# EAGLE board DSP_DC_SYNTH (EAGLE 8.6.0)

Size 100 x 100 mm. Coordinates in mm from the lower left corner, seen from the top.
Outline: 0,0 100,0 100,100 0,100 0,0
Copper layers (1*16): Top 0.035mm / dielectric 1.5mm / Bottom 0.035mm
Design rules "default *": minimum track width 6mil, minimum drill 0.35mm, track to track 6mil, track to pad 6mil, pad to pad 6mil, via to via 6mil, smd to smd 6mil, copper to edge 40mil, drill to drill 6mil, minimum pad ring 10mil, minimum via ring 8mil, stop-mask expansion 4mil, vias tented up to drill 0mil, thermal gap 10mil
Holes 4 mm at 4,96 96,96 96,4 4,4

## Footprints (pad centres in the part's own frame; a part is rotated, then mirrored left to right if it is on the bottom)
R0603 = smd 1 x 1.1: 1 -0.85,0; 2 0.85,0
EXV-9G = smd 3.2 x 1.473: 1 -2.807,0; 2 2.807,0
0603 = smd 1 x 1.1: 1 -0.85,0; 2 0.85,0
KWL-R1025VB = drill 1.016: 1+ 0,0; 1- 0,7.62; 2+ 2.54,0; 2- 2.54,7.62; 3+ 5.08,0; 3- 5.08,7.62; 4+ 7.62,0; 4- 7.62,7.62; 5+ 10.16,0; 5- 10.16,7.62; 6+ 12.7,0; 6- 12.7,7.62; 7+ 15.24,0; 7- 15.24,7.62; 8+ 17.78,0; 8- 17.78,7.62; 9+ 20.32,0; 9- 20.32,7.62; 10+ 22.86,0; 10- 22.86,7.62
1X02 = drill 1.016 pad 1.88: 1 0,0; 2 2.54,0
CONN6_SJ-43516-SMT = smd 2.007 x 2.311: 1 -7.772,-7.9; 3 -5.893,0 | smd 2.21 x 2.311: 2 -4.978,-7.9; 4 -3.099,0 | drill 1.702 pad 2.21: 5 -4.902,-3.962; 6 2.108,-3.962 | smd 2.591 x 2.794: 7 8.407,-3.188 | smd 2.794 x 2.311: 8 3.655,-7.9
U.FL = smd 1.05 x 1: 1 -1.525,0 | smd 2.2 x 1.05: 2 0,1.475; 3 0,-1.475
1X11 = drill 1.016 pad 1.88: 1 0,0; 2 2.54,0; 3 5.08,0; 4 7.62,0; 5 10.16,0; 6 12.7,0; 7 15.24,0; 8 17.78,0; 9 20.32,0; 10 22.86,0; 11 25.4,0
1X08 = drill 1.016 pad 1.88: 1 0,0; 2 2.54,0; 3 5.08,0; 4 7.62,0; 5 10.16,0; 6 12.7,0; 7 15.24,0; 8 17.78,0
1X03 = drill 1.016 pad 1.88: 1 0,0; 2 2.54,0; 3 5.08,0
BO_4611X = drill 0.813 pad 1.321 square: 1 0,0 | drill 0.813 pad 1.321: 2 -2.54,0; 3 -5.08,0; 4 -7.62,0; 5 -10.16,0; 6 -12.7,0; 7 -15.24,0; 8 -17.78,0; 9 -20.32,0; 10 -22.86,0; 11 -25.4,0
NKK_SPDT_BRKT = drill 1.016: 1 0,0; 2 0,-2.54; 3 2.54,-2.54; 4 5.08,-2.54; 5 7.62,-2.54; 6 10.16,-2.54; 7 10.16,0
TEENSY_3.2_SOCKET = drill 1.016: 0 0,-2.54; 1 0,-5.08; 2 0,-7.62; 3 0,-10.16; 3V3 5.08,-33.02; 3V3_LIM 15.24,-5.08; 4 0,-12.7; 5 0,-15.24; 6 0,-17.78; 7 0,-20.32; 8 0,-22.86; 9 0,-25.4; 10 0,-27.94; 11 0,-30.48; 12 0,-33.02; 13 15.24,-33.02; 14 15.24,-30.48; 15 15.24,-27.94; 16 15.24,-25.4; 17 15.24,-22.86; 18 15.24,-20.32; 19 15.24,-17.78; 20 15.24,-15.24; 21 15.24,-12.7; 22 15.24,-10.16; 23 15.24,-7.62; AGND 15.24,-2.54; DAC 12.7,-33.02; GND_0 0,0; GND_1 7.62,-33.02; VIN 15.24,0
5V_REG = smd 0.93 x 1.76: 1 -2.3,-3.125; 2 0,-3.125; 3 2.3,-3.125 | smd 3.19 x 1.76: 4 0,3.125
MIXER = smd 0.76 x 2.16: 1 0,0; 2 1.27,0; 3 2.54,0; 4 3.81,0; 5 5.08,0; 6 5.08,5.36; 7 3.81,5.36; 8 2.54,5.36; 9 1.27,5.36; 10 0,5.36 | drill 0.203 pad 0.61: P$1 0,-1.778; P$2 1.27,-1.778; P$3 3.81,-1.778; P$4 0,2.413; P$5 0,3.429; P$6 1.27,2.413; P$7 1.27,3.429; P$8 2.54,3.429; P$9 2.54,2.413; P$10 3.81,3.429; P$11 3.81,2.413; P$12 5.08,3.429; P$13 5.08,2.413; P$14 1.27,7.112; P$15 2.54,7.112; P$16 3.81,7.112; P$17 5.08,7.112
M08A = smd 1.981 x 0.559: 1 -2.464,1.905; 2 -2.464,0.635; 3 -2.464,-0.635; 4 -2.464,-1.905; 5 2.464,-1.905; 6 2.464,-0.635; 7 2.464,0.635; 8 2.464,1.905
DIGITAL_POT = smd 1.469 x 0.407: 1 -2.871,1.95; 2 -2.871,1.3; 3 -2.871,0.65; 4 -2.871,0; 5 -2.871,-0.65; 6 -2.871,-1.3; 7 -2.871,-1.95; 8 2.871,-1.95; 9 2.871,-1.3; 10 2.871,-0.65; 11 2.871,0; 12 2.871,0.65; 13 2.871,1.3; 14 2.871,1.95
SOT-23-5_MC = smd 1.321 x 0.559: 1 -1.295,0.95; 2 -1.295,0; 3 -1.295,-0.95; 4 1.295,-0.95; 5 1.295,0.95
MTC16 = smd 1.422 x 0.356: 1 -2.845,2.275; 2 -2.845,1.625; 3 -2.845,0.975; 4 -2.845,0.325; 5 -2.845,-0.325; 6 -2.845,-0.975; 7 -2.845,-1.625; 8 -2.845,-2.275; 9 2.845,-2.275; 10 2.845,-1.625; 11 2.845,-0.975; 12 2.845,-0.325; 13 2.845,0.325; 14 2.845,0.975; 15 2.845,1.625; 16 2.845,2.275
21-0036K = smd 1.372 x 0.406: 1 -2.184,0.975; 2 -2.184,0.325; 3 -2.184,-0.325; 4 -2.184,-0.975; 5 2.184,-0.975; 6 2.184,-0.325; 7 2.184,0.325; 8 2.184,0.975
TT1224 = smd 1.524 x 1.651: 1 0,0; 2 2.54,0; 3 5.08,0; 4 5.08,5.969; 5 2.54,5.969; 6 0,5.969
NHD-C12864A1Z-FSW-FBW-HTT = drill 0.813 pad 1.321 square: 1 7.62,0 | drill 0.813 pad 1.321: 2 10.16,0; 3 12.7,0; 4 15.24,0; 5 17.78,0; 6 20.32,0; 7 59.69,0; 8 62.23,0; 9 64.77,0; 10 67.31,0; 11 69.85,0; 12 72.39,0
ASTX-H11 = smd 0.85 x 0.65: 1 -0.775,0.825; 2 -0.775,-0.825; 3 0.775,-0.825; 4 0.775,0.825

## Placement (x,y rotation side)
C1  10uF  [R0603]  8.89,78.11 180 top
C2  100uF  [R0603]  17.14,73.03 90 top
C3  5.6uF  [R0603]  32.07,80.33 90 top
C4  5.6uF  [R0603]  37.47,90.17 90 top
C5  330pF  [R0603]  28.89,88.9 90 top
C6  0.1uF  [R0603]  -97.79,114.3 0 top  (outside the outline)
C7  0.1uF  [R0603]  32.38,94.3 90 top
C8  100uF  [EXV-9G]  23.5,94.3 0 top
C9  10uF  [R0603]  17.14,69.53 270 top
C10  100uF  [R0603]  25.4,72.39 0 top
C11  470pF  [R0603]  25.4,70.17 0 top
C12  0.1uF  [R0603]  21.59,79.69 0 top
C13  0.1uF  [R0603]  26.99,79.06 270 top
C14  0.1uF  [0603]  -30.48,119.38 0 top  (outside the outline)
C15  0.1uF  [0603]  -36.83,119.38 0 top  (outside the outline)
C16  0.1uF  [0603]  -43.18,119.38 0 top  (outside the outline)
C17  0.1uF  [0603]  -49.53,119.38 0 top  (outside the outline)
C18  0.22uF  [0603]  -100.33,107.95 0 top  (outside the outline)
C19  0.1uF  [0603]  -55.88,119.38 0 top  (outside the outline)
C20  0.22uF  [0603]  -107.95,107.95 0 top  (outside the outline)
C21  82pF  [0603]  -36.83,124.46 0 top  (outside the outline)
C22  27pF  [0603]  -43.18,124.46 0 top  (outside the outline)
C23  100pF  [0603]  -48.26,114.3 0 top  (outside the outline)
C24  82pF  [0603]  -49.53,124.46 0 top  (outside the outline)
C25  12pF  [0603]  -55.88,124.46 0 top  (outside the outline)
C26  100pF  [0603]  -55.88,114.3 0 top  (outside the outline)
C27  100pF  [0603]  -63.5,114.3 0 top  (outside the outline)
C28  0.1uF  [0603]  -62.23,119.38 0 top  (outside the outline)
C29  100pF  [0603]  -71.12,114.3 0 top  (outside the outline)
C30  0.1uF  [0603]  -68.58,119.38 0 top  (outside the outline)
C31  100pF  [0603]  -78.74,114.3 0 top  (outside the outline)
C32  0.1uF  [0603]  -74.93,119.38 0 top  (outside the outline)
D1  KWL-R1025VB  [KWL-R1025VB]  87,89.53 180 top
J1  [1X02]  2.86,77.79 0 top
J2  3.5HEADPHONEJACK  [CONN6_SJ-43516-SMT]  16.51,88.27 270 top
J3  [1X02]  2.86,69.53 0 top
J4  [1X02]  2.86,73.66 0 top
J5  U.FL_CONN  [U.FL]  30.8,75.25 180 top
J6  U.FL_CONN  [U.FL]  40.96,84.77 90 top
J7  [1X02]  -105.41,-9.53 0 top  (outside the outline)
J8  [1X02]  -36.83,134.62 0 top  (outside the outline)
J9  [1X02]  -43.18,134.62 0 top  (outside the outline)
J10  [1X02]  -49.53,134.62 0 top  (outside the outline)
J11  [1X02]  -55.88,134.62 0 top  (outside the outline)
J12  [1X02]  -62.23,134.62 0 top  (outside the outline)
J13  [1X11]  -55.88,129.54 0 top  (outside the outline)
J14  [1X08]  -26.04,91.44 0 top  (outside the outline)
J15  [1X03]  -105.41,129.54 0 top  (outside the outline)
J17  U.FL_CONN  [U.FL]  -83.82,99.06 0 top  (outside the outline)
R1  4711X_RES  [BO_4611X]  89.53,92.71 0 top
R2  100K  [0603]  -81.28,119.38 0 top  (outside the outline)
R3  50  [R0603]  -102.87,124.46 0 top  (outside the outline)
R4  1k  [R0603]  28.89,85.72 270 top
R5  100k  [R0603]  25.08,88.9 270 top
R6  1k  [R0603]  34.61,94.3 90 top
R7  1k  [R0603]  19.68,75.25 0 top
R8  1k  [R0603]  21.59,77.47 0 top
R9  1k  [R0603]  24.45,79.06 270 top
R10  1k  [R0603]  27.62,82.23 180 top
R11  100K  [0603]  -87.63,119.38 0 top  (outside the outline)
R12  100K  [0603]  -93.98,119.38 0 top  (outside the outline)
R13  100K  [0603]  -100.33,119.38 0 top  (outside the outline)
R14  100K  [0603]  -106.68,119.38 0 top  (outside the outline)
R15  100K  [0603]  -17.78,124.46 0 top  (outside the outline)
R16  1K  [0603]  -78.74,124.46 0 top  (outside the outline)
R17  56K  [0603]  -83.82,124.46 0 top  (outside the outline)
R18  NP  [0603]  -88.9,124.46 0 top  (outside the outline)
R19  18  [0603]  -93.98,124.46 0 top  (outside the outline)
R20  10  [0603]  -99.06,124.46 0 top  (outside the outline)
R21  100k  [0603]  -68.58,124.46 0 top  (outside the outline)
S1  NKK_B12AB  [NKK_SPDT_BRKT]  8.26,34.92 90 top
S2  NKK_B18AB  [NKK_SPDT_BRKT]  95.89,45.09 270 top
TEENSY_3.2  TEENSY_3.2_SOCKET  [TEENSY_3.2_SOCKET]  89.53,79.38 270 top
U1  5V_REG  [5V_REG]  11.75,72.39 180 top
U2  MIXER  [MIXER]  36.2,80.33 270 top
U3  DUAL_OP_AMP_LMV822  [M08A]  21.91,84.14 0 top
U4  DIGITAL_POTDIGITAL_POT  [DIGITAL_POT]  33.34,87.31 90 top
U5  TC1185-3.3VCT713  [SOT-23-5_MC]  20.95,71.12 0 top
U6  LMX2326  [MTC16]  -17.78,107.95 0 top  (outside the outline)
U7  MAX2752  [21-0036K]  -90.17,106.68 0 top  (outside the outline)
U8  RMK-3-93+  [TT1224]  -44.45,96.52 0 top  (outside the outline)
U$1  NHD-C12864A1Z-FSW-FBW-HTT  [NHD-C12864A1Z-FSW-FBW-HTT]  89.53,58.74 180 top
XO1  ASTX-H11  [ASTX-H11]  -24.13,106.68 0 top  (outside the outline)

## Library data of the parts
C1-C7 C9-C13 J2 R3-R10 U1-U4 = 764Library
C8 = 764Library; MANUFACTURER_PART_NUMBER: EDK107M6R3A9GAA; VENDOR: KEMET
C14-C32 D1 R1 R2 R11-R21 S1 S2 TEENSY_3.2 U6-U8 U$1 XO1 = kiss_z
J1 J3 J4 J7-J13 J15 = SparkFun-Connectors
J5 J6 J17 = 764Library; AVAILABILITY: Unavailable; DESCRIPTION: U.FL Series 50 Ohm Receptacle Male Pins Ultra Small SMT Coaxial Connector; MF: Hirose; MP: U.FL-R-SMT_10_; PACKAGE: FakePackage u; PRICE: None
J14 = SparkFun-Connectors; PROD_ID: CONN-08438
U5 = 764Library; MANUFACTURER_PART_NUMBER: TC11853.3VCT713; VENDOR: Microchip

## Nets
3.3V: C6.1 C7.1 C10.1 R7.1 R10.1 U3.8 U4.14 U5.5
5.8GHZ: J6.1 U2.10
9V: C1.1 J1.2 J3.2 J4.2 U1.3
19: J13.9
20: J13.10
21: J13.11 TEENSY_3.2.21
+3V3: C16.1 C17.1 C19.1 C23.1 C27.1 C28.1 C29.1 C30.1 J11.1 J13.5 J14.1 R1.1 R14.2 R16.1 R19.1 R20.1 S1.3 S2.3 TEENSY_3.2.3V3 TEENSY_3.2.3V3_LIM U$1.3 U$1.11 XO1.4
+5V: C2.1 C9.1 C15.1 J9.1 TEENSY_3.2.VIN U1.2 U1.4 U5.1 U5.3
ADC_IN: C18.2 J13.8 R2.2 R11.1 TEENSY_3.2.20
AUDIO_OUT: C8.1 C18.1 J8.1 J12.1 U3.7 U4.9
AUDIO_OUTPUT: C8.2 J2.3 J2.4 J2.7 J2.8
CP_OUT: C25.1 R17.2 U6.2 U7.2
CS_LCD: TEENSY_3.2.10 U$1.6
CS_POT: J13.6 TEENSY_3.2.16 U4.1
DAC_OUT: C14.2 J10.1
EXT_REF: J7.1 J15.3
FL_OUT: R18.2
GND: C1.2 C2.2 C6.2 C7.2 C9.2 C10.2 C11.2 C12.2 C13.2 C15.2 C16.2 C17.2 C19.2 C20.2 C23.2 C24.2 C25.2 C27.2 C28.2 C29.2 C30.2 C31.2 C32.2 J1.1 J2.1 J2.2 J3.1 J4.1 J5.2 J5.3 J6.2 J6.3 J7.2 J8.2 J9.2 J10.2 J11.2 J12.2 J13.4 J14.8 J17.2 J17.3 R3.1 R8.2 R9.2 R11.2 R15.1 R21.1 S1.5 S2.5 TEENSY_3.2.AGND TEENSY_3.2.GND_0 TEENSY_3.2.GND_1 U1.1 U2.1 U2.2 U2.4 U2.6 U2.7 U2.8 U2.9 U2.P$1 U2.P$2 U2.P$3 U2.P$4 U2.P$5 U2.P$6 U2.P$7 U2.P$8 U2.P$9 U2.P$10 U2.P$11 U2.P$12 U2.P$13 U2.P$14 U2.P$15 U2.P$16 U2.P$17 U3.4 U4.4 U4.10 U5.2 U6.3 U6.4 U6.9 U7.3 U7.8 U8.2 U8.3 U8.5 U8.6 U$1.7 U$1.8 U$1.10 XO1.2
IF: C3.1 R3.2 U2.3
MISO: J13.1 TEENSY_3.2.12 U4.13
MOSI: J13.2 TEENSY_3.2.11 U4.3 U6.12 U$1.2
N$1: C4.1 C5.2 R5.1 U3.1
N$2: C14.1 TEENSY_3.2.DAC
N$3: C3.2 R4.2
N$4: C12.1 R7.2 R8.1 U3.3
N$5: C11.1 U5.4
N$6: D1.1+ R1.2
N$7: C4.2 R6.2
N$8: C13.1 R9.1 R10.2 U3.5
N$9: C5.1 R4.1 R5.2 U3.2
N$10: D1.2+ R1.3
N$11: D1.3+ R1.4
N$12: D1.4+ R1.5
N$13: R6.1 U3.6 U4.8
N$14: D1.5+ R1.6
N$15: D1.6+ R1.7
N$16: D1.7+ R1.8
N$17: D1.8+ R1.9
N$18: D1.9+ R1.10
N$19: D1.10+ R1.11
N$20: D1.1- TEENSY_3.2.0
N$21: D1.2- TEENSY_3.2.1
N$22: D1.3- TEENSY_3.2.2
N$23: D1.4- TEENSY_3.2.3
N$24: D1.5- TEENSY_3.2.4
N$25: D1.6- TEENSY_3.2.5
N$26: D1.7- TEENSY_3.2.6
N$27: D1.8- TEENSY_3.2.7
N$28: D1.9- TEENSY_3.2.8
N$29: D1.10- TEENSY_3.2.9
N$30: R13.2 R14.1 R15.2 S2.4
N$31: R12.2 S1.4
N$32: C20.1 R2.1 R16.2
N$33: C21.2 U8.1
N$34: C22.1 U8.4
N$35: C26.1 U6.8
N$36: C24.1 R17.1 R18.1
N$37: C31.1 U6.5
N$38: C32.1 U7.1
N$40: C22.2 J17.1
OSC_PLL_BU_EN: J14.2 J14.3 R21.2 TEENSY_3.2.19 U6.10 U7.4 XO1.1
PLL_BU_MUX: J14.7 TEENSY_3.2.18 U6.14
PLL_CLK: J14.4
PLL_IN: C26.2 J15.2
PLL_LE: J13.7 J14.6 TEENSY_3.2.17 U6.13
PLL_MOSI: J14.5
PLL_VCC: R19.2 U6.7 U6.15 U6.16
RAW_RF: J5.1 U2.5
REG_LCD: TEENSY_3.2.15 U$1.4
RST_LCD: TEENSY_3.2.14 U$1.5
SCLK: J13.3 TEENSY_3.2.13 U4.2 U6.11 U$1.1
SW_MOM: R13.1 TEENSY_3.2.22
SW_TOG: R12.1 TEENSY_3.2.23
TCXO_OUT: J15.1 XO1.3
VCO_OUT: C21.1 U7.7
VCO_VCC: R20.2 U7.5 U7.6

## Tracks (layer width: path | path; a pad name or v marks a point on that pad's centre or on a via)
3.3V  (7 unrouted)
5.8GHZ  (1 unrouted)
9V  (4 unrouted)
21  (1 unrouted)
+3V3  (22 unrouted)
+5V  (8 unrouted)
ADC_IN  (4 unrouted)
AUDIO_OUT  (5 unrouted)
AUDIO_OUTPUT  (4 unrouted)
CP_OUT  (3 unrouted)
CS_LCD  (1 unrouted)
CS_POT  (2 unrouted)
DAC_OUT  (1 unrouted)
EXT_REF  (1 unrouted)
GND  (94 unrouted)
IF  (2 unrouted)
MISO  (2 unrouted)
MOSI  (4 unrouted)
N$1  (3 unrouted)
N$2  (1 unrouted)
N$3  (1 unrouted)
N$4  (3 unrouted)
N$5  (1 unrouted)
N$6  (1 unrouted)
N$7  (1 unrouted)
N$8  (3 unrouted)
N$9  (3 unrouted)
N$10  (1 unrouted)
N$11  (1 unrouted)
N$12  (1 unrouted)
N$13  (2 unrouted)
N$14  (1 unrouted)
N$15  (1 unrouted)
N$16  (1 unrouted)
N$17  (1 unrouted)
N$18  (1 unrouted)
N$19  (1 unrouted)
N$20  (1 unrouted)
N$21  (1 unrouted)
N$22  (1 unrouted)
N$23  (1 unrouted)
N$24  (1 unrouted)
N$25  (1 unrouted)
N$26  (1 unrouted)
N$27  (1 unrouted)
N$28  (1 unrouted)
N$29  (1 unrouted)
N$30  (3 unrouted)
N$31  (1 unrouted)
N$32  (2 unrouted)
N$33  (1 unrouted)
N$34  (1 unrouted)
N$35  (1 unrouted)
N$36  (2 unrouted)
N$37  (1 unrouted)
N$38  (1 unrouted)
N$40  (1 unrouted)
OSC_PLL_BU_EN  (6 unrouted)
PLL_BU_MUX  (2 unrouted)
PLL_IN  (1 unrouted)
PLL_LE  (3 unrouted)
PLL_VCC  (3 unrouted)
RAW_RF  (1 unrouted)
REG_LCD  (1 unrouted)
RST_LCD  (1 unrouted)
SCLK  (4 unrouted)
SW_MOM  (1 unrouted)
SW_TOG  (1 unrouted)
TCXO_OUT  (1 unrouted)
VCO_OUT  (1 unrouted)
VCO_VCC  (2 unrouted)

## Text on the board
tPlace: GND +9V | PWR | TX | RX